# Altium PCB DMA.PcbDoc
Units mm, origin at the board's own origin, x right, y up, seen from the top; angles counter-clockwise.
Board outline 350 x 90 mm, 4 copper layers (Top Layer, Int1, Int2, Bottom Layer), stack 1.49 mm thick; 56 components, 30 nets, 162 pads, 356 vias.
Unrouted connection lines stored in the file: 5.
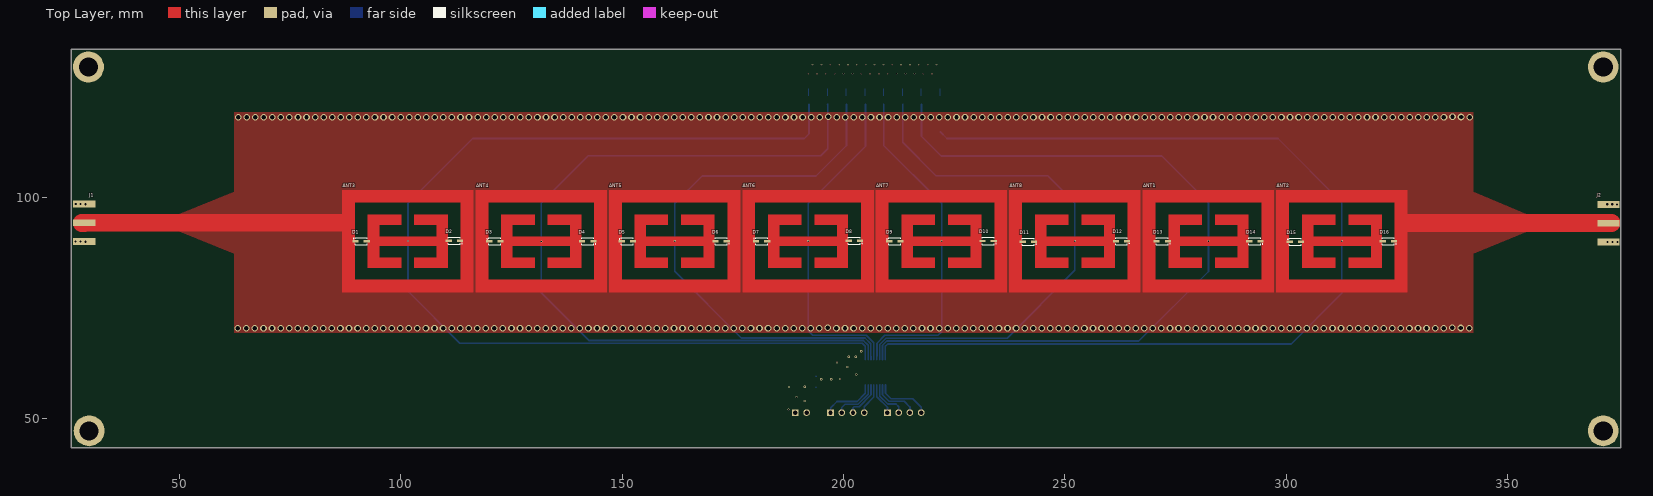
[diagram p0: Top Layer view]
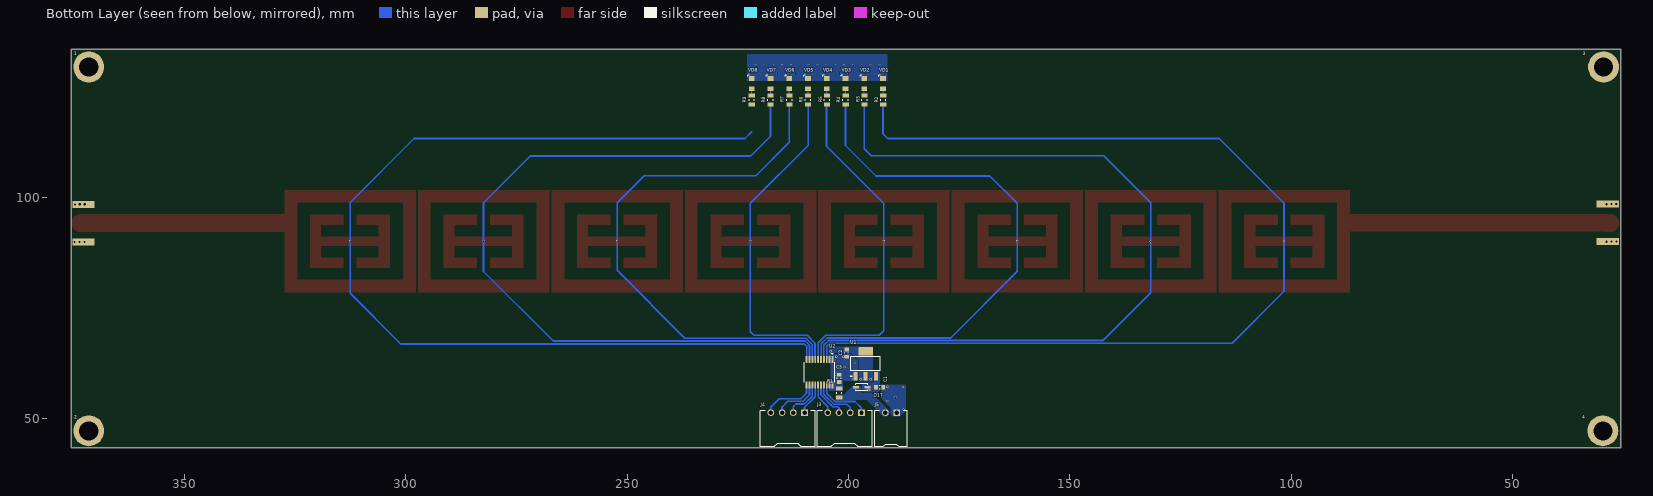
[diagram p1: Bottom Layer view, seen from below]
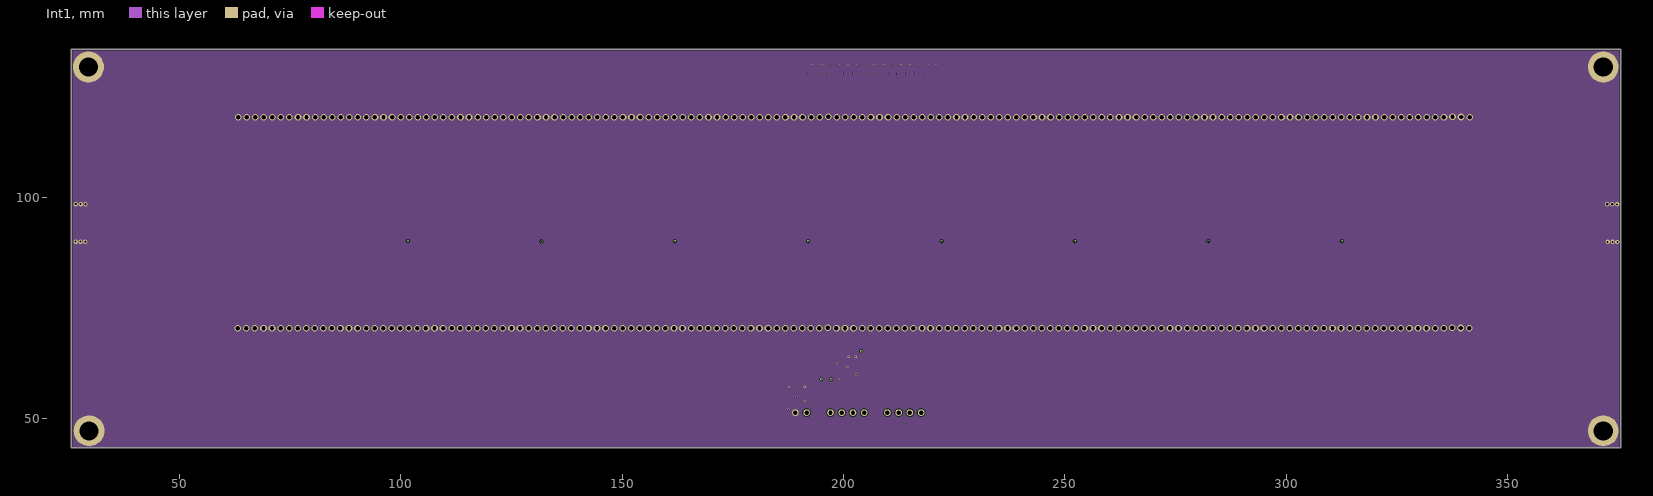
[diagram p2: Int1]
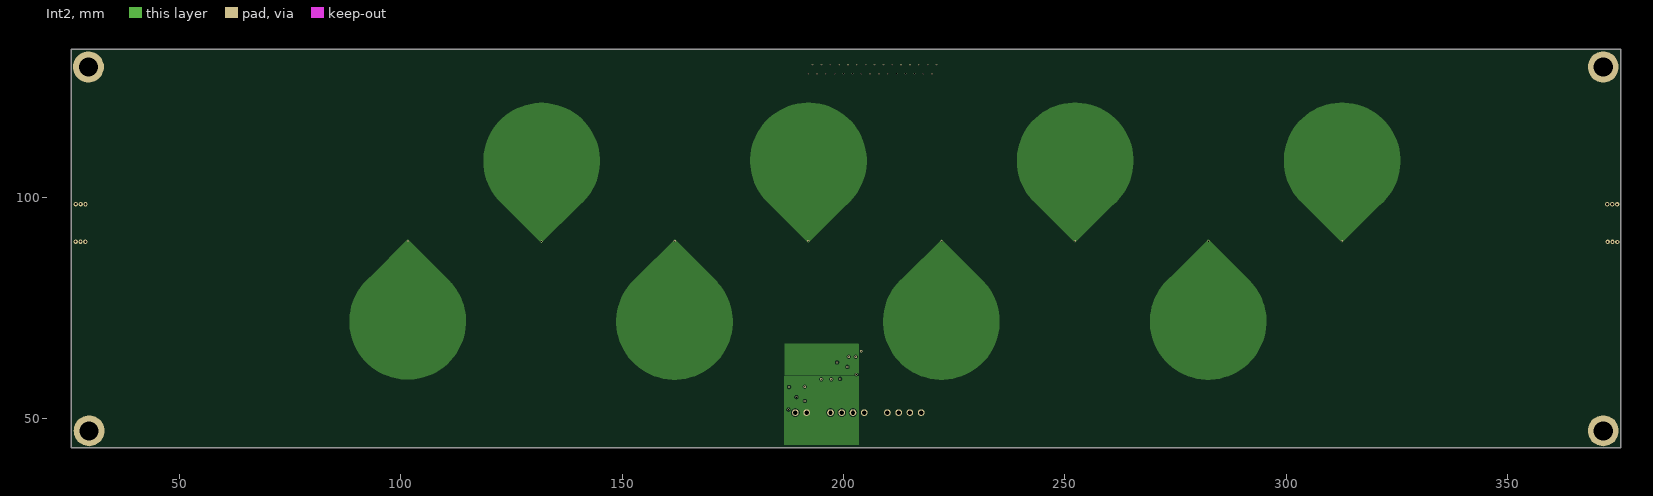
[diagram p3: Int2]
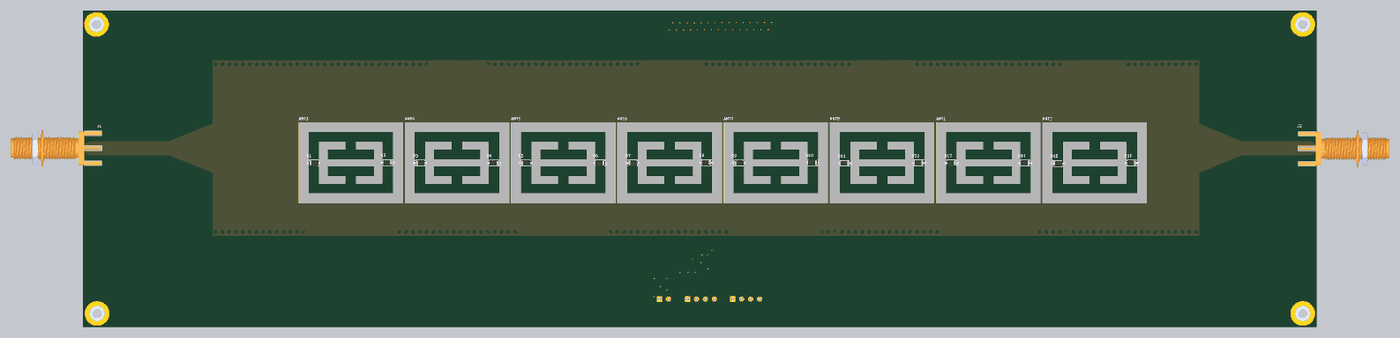
[diagram p4: 3D render of the assembled board from above, using the file's embedded part models]
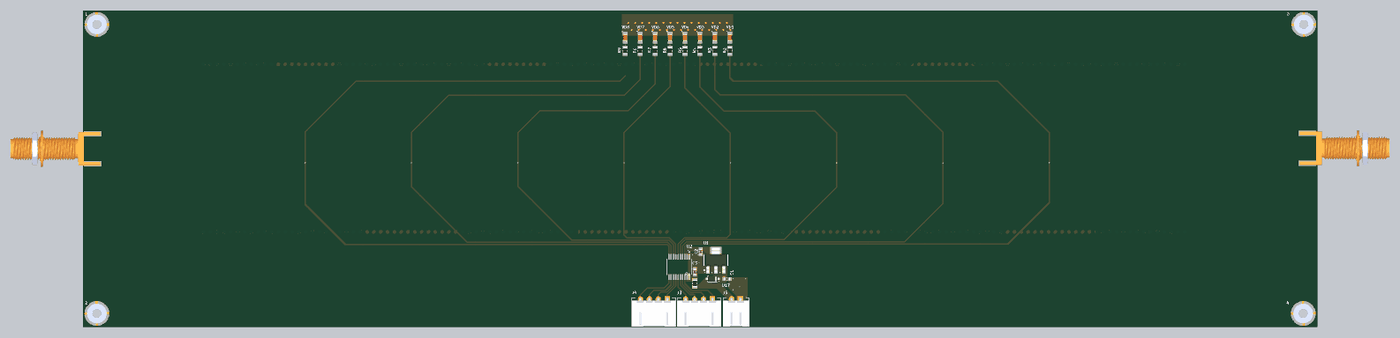
[diagram p5: 3D render of the assembled board from below, using the file's embedded part models]

## Layer stack, top to bottom
Top Solder: solder mask 0.0254, SM-001, Dk 3.5
Top Layer: signal copper 0.035
Dielectric 1: prepreg 0.127, FR4, Dk 4.2
Dielectric 2: prepreg 0.193, FR4, Dk 4.6
Int1: signal copper 0.035
Dielectric 3: core 0.71, FR4, Dk 4.6
Int2: signal copper 0.035
Dielectric 4: prepreg 0.193, FR4, Dk 4.6
Dielectric 5: prepreg 0.127, FR4, Dk 4.2
Bottom Layer: signal copper 0.035
Bottom Solder: solder mask 0.0254, SM-001, Dk 3.5

## Board outline
25.55,43.475 25.55,133.475 375.55,133.475 375.55,43.475

## Design rules (kind name [scope] priority, off if disabled: settings)
AcuteAngle [All] p1: minimum=3.50000000000000E+0001 checktracksonly=FALSE
BoardOutlineClearance "BoardOutlineClearance 1" [All] p1: gap=0.25 ignorepadtopadclearanceinfootprint=FALSE except(0: Arc-SplitContinuation Track-SplitContinuation SMDPad-SplitContinuation THPad-SplitContinuation Via-SplitContinuation Fill-SplitContinuation Poly-SplitContinuation Region-SplitContinuation Text-SplitContinuation) // Milling
BoardOutlineClearance "BoardOutlineClearance 2" [All] p2 off: gap=0.4 ignorepadtopadclearanceinfootprint=FALSE except(0: Arc-SplitContinuation Track-SplitContinuation SMDPad-SplitContinuation THPad-SplitContinuation Via-SplitContinuation Fill-SplitContinuation Poly-SplitContinuation Region-SplitContinuation Text-SplitContinuation) // V-Cut
Clearance "Clearance 3 Oz" [All] p1 off: gap=0.35 ignorepadtopadclearanceinfootprint=FALSE except(0.25: Arc-Hole Track-Hole SMDPad-Hole THPad-Hole Via-Hole Fill-Hole Poly-Hole Region-Hole Text-Hole)
Clearance "Clearance 2 Oz" [All] p2 off: gap=0.3 ignorepadtopadclearanceinfootprint=FALSE except(0.25: Arc-Hole Track-Hole SMDPad-Hole THPad-Hole Via-Hole Fill-Hole Poly-Hole Region-Hole Text-Hole)
Clearance "Clearance-1 1 Oz" [All] p3: gap=0.2 ignorepadtopadclearanceinfootprint=TRUE except(0: SMDPad-SMDPad; 0.25: Arc-Hole Track-Hole SMDPad-Hole THPad-Hole Via-Hole Fill-Hole Poly-Hole Region-Hole Text-Hole) // Standart
Clearance "Clearance-2 1 Oz" [All] p4 off: gap=0.15 ignorepadtopadclearanceinfootprint=FALSE except(0.2: Arc-Fill Arc-Poly Track-Fill Track-Poly SMDPad-Fill SMDPad-Poly THPad-Fill THPad-Poly Via-Fill Via-Poly Fill-Fill Fill-Poly Poly-Poly; 0.25: Arc-Hole Track-Hole SMDPad-Hole THPad-Hole Via-Hole Fill-Hole Poly-Hole Region-Hole Text-Hole) // Advance
Clearance "Clearance-1 1/2 Oz" [All] p5 off: gap=0.125 ignorepadtopadclearanceinfootprint=FALSE except(0.2: Arc-Fill Arc-Poly Track-Fill Track-Poly SMDPad-SMDPad SMDPad-Fill SMDPad-Poly THPad-Fill THPad-Poly Via-Fill Via-Poly Fill-Fill Fill-Poly Poly-Poly Poly-Region Poly-Text; 0.25: Arc-Hole Track-Hole SMDPad-Hole THPad-Hole Via-Hole Fill-Hole Poly-Hole Region-Hole Text-Hole) // Standart
Clearance "Clearance-2 1/2 Oz" [All] p6 off: gap=0.1 ignorepadtopadclearanceinfootprint=FALSE except(0.15: Arc-Fill Arc-Poly Track-Fill Track-Poly SMDPad-SMDPad SMDPad-Fill SMDPad-Poly THPad-Fill THPad-Poly Via-Fill Via-Poly Fill-Fill Fill-Poly Poly-Poly Poly-Region Poly-Text; 0.25: Arc-Hole Track-Hole SMDPad-Hole THPad-Hole Via-Hole Fill-Hole Poly-Hole Region-Hole Text-Hole) // Advance
ComponentClearance [InComponent('No Component') vs InComponent('No Component')] p1: gap=0.254 collisioncheckmode=3 verticalgap=0.254 showdistances=FALSE
DiffPairsRouting "DiffPairsRouting 1 Oz" [All] p1: maxlimit=0.254 minlimit=0.2 mostfreqgap=0.254 toplayer_minwidth=0.2 toplayer_maxwidth=0.381 toplayer_prefwidth=0.381 midlayer1_minwidth=0.2 midlayer1_maxwidth=0.381 midlayer1_prefwidth=0.381 midlayer2_minwidth=0.2 midlayer2_maxwidth=0.381 midlayer2_prefwidth=0.381 bottomlayer_minwidth=0.2 bottomlayer_maxwidth=0.381 bottomlayer_prefwidth=0.381 maxuncoupledlength=12.7
DiffPairsRouting "DiffPairsRouting 1/2 Oz" [All] p2 off: maxlimit=0.254 minlimit=0.1 mostfreqgap=0.254 toplayer_minwidth=0.1 toplayer_maxwidth=0.381 toplayer_prefwidth=0.381 midlayer1_minwidth=0.1 midlayer1_maxwidth=0.381 midlayer1_prefwidth=0.381 midlayer2_minwidth=0.1 midlayer2_maxwidth=0.381 midlayer2_prefwidth=0.381 bottomlayer_minwidth=0.1 bottomlayer_maxwidth=0.381 bottomlayer_prefwidth=0.381 maxuncoupledlength=12.7
HoleSize "Minimum HoleSize" [IsPad] p1 off: absolutevalues=TRUE maxlimit=5.9 minlimit=0.6 maxpercent=80.000 minpercent=20.000
HoleSize "Minimum HoleSize VIA 1" [IsVia] p2: absolutevalues=TRUE maxlimit=5.9 minlimit=0.3 maxpercent=80.000 minpercent=20.000 // Standart
HoleSize "Minimum HoleSize VIA 2" [IsVia] p3 off: absolutevalues=TRUE maxlimit=5.9 minlimit=0.2 maxpercent=80.000 minpercent=20.000 // Advance
HoleToHoleClearance Hole2HoleClearance [All] p1: gap=0.25 allowstackedmicrovias=FALSE
MinimumAnnularRing "Minimum AR VIA Standart" [IsVia] p1: minimumring=0.15
MinimumAnnularRing "Minimum AR PAD Standart" [IsPAD] p2: minimumring=0.2
MinimumAnnularRing "Minimum AR VIA Advance" [IsVia] p3 off: minimumring=0.1
MinimumAnnularRing "Minimum AR PAD Advance" [IsPAD] p4 off: minimumring=0.15
MinimumSolderMaskSliver "SolderMask Bridge Standart" [All] p1: minsoldermaskwidth=0.15 // All Masks
MinimumSolderMaskSliver "SolderMask Bridge Advance" [All] p2 off: minsoldermaskwidth=0.1 // Mask LDI
PlaneClearance "PlaneClearance 3 Oz" [All] p1 off: clearance=0.35
PlaneClearance "PlaneClearance 2 Oz" [All] p2 off: clearance=0.3
PlaneClearance "PlaneClearance 1 Oz" [All] p3: clearance=0.2
PlaneClearance "PlaneClearance-1 1/2 Oz" [All] p4 off: clearance=0.2 // Standart
PlaneClearance "PlaneClearance-2 1/2 Oz" [All] p5 off: clearance=0.15 // Advance
PlaneConnect "TermalConnect 3 Oz" [All] p1 off: planeconnectstyle=Relief reliefexpansion=0.2 reliefentries=4 reliefconductorwidth=0.35 reliefairgap=0.35 // Standart
PlaneConnect "TermalConnect 2 Oz" [All] p2 off: planeconnectstyle=Relief reliefexpansion=0.2 reliefentries=4 reliefconductorwidth=0.3 reliefairgap=0.3 // Standart
PlaneConnect "TermalConnect-1 1 Oz" [All] p3: planeconnectstyle=Relief reliefexpansion=0.2 reliefentries=4 reliefconductorwidth=0.2 reliefairgap=0.2 // Standart
PlaneConnect "TermalConnect-2 1 Oz" [All] p4 off: pad.planeconnectstyle=Relief pad.reliefexpansion=0.15 pad.reliefentries=4 pad.reliefconductorwidth=0.2 pad.reliefairgap=0.2 via.planeconnectstyle=Direct via.reliefexpansion=0.15 via.reliefentries=4 via.reliefconductorwidth=0.15 via.reliefairgap=0.15 // Advance
PlaneConnect "TermalConnect-1 1/2 Oz" [All] p5 off: planeconnectstyle=Relief reliefexpansion=0.2 reliefentries=4 reliefconductorwidth=0.2 reliefairgap=0.2 // Standart
PlaneConnect "TermalConnect-2 1/2 Oz" [All] p6 off: pad.planeconnectstyle=Relief pad.reliefexpansion=0.15 pad.reliefentries=4 pad.reliefconductorwidth=0.15 pad.reliefairgap=0.15 via.planeconnectstyle=Direct via.reliefexpansion=0.15 via.reliefentries=4 via.reliefconductorwidth=0.15 via.reliefairgap=0.15 // Advance
PolygonConnect "PolygonConnect 3 Oz" [All] p1 off: thpad.connectstyle=Relief thpad.reliefconductorwidth=0.35 thpad.reliefentries=4 thpad.polygonreliefangle="90 Angle" thpad.airgapwidth=0.35 smdpad.connectstyle=Relief smdpad.reliefconductorwidth=0.35 smdpad.reliefentries=4 smdpad.polygonreliefangle="90 Angle" smdpad.airgapwidth=0.35 via.connectstyle=Direct via.reliefconductorwidth=0.254 via.reliefentries=4 via.polygonreliefangle="90 Angle" via.airgapwidth=0.254
PolygonConnect "PolygonConnect 2 Oz" [All] p2 off: thpad.connectstyle=Relief thpad.reliefconductorwidth=0.3 thpad.reliefentries=4 thpad.polygonreliefangle="90 Angle" thpad.airgapwidth=0.3 smdpad.connectstyle=Relief smdpad.reliefconductorwidth=0.3 smdpad.reliefentries=4 smdpad.polygonreliefangle="90 Angle" smdpad.airgapwidth=0.3 via.connectstyle=Direct via.reliefconductorwidth=0.254 via.reliefentries=4 via.polygonreliefangle="90 Angle" via.airgapwidth=0.254
PolygonConnect "PolygonConnect-1 1 Oz" [All] p3: connectstyle=Direct reliefconductorwidth=0.2 reliefentries=4 polygonreliefangle="90 Angle" airgapwidth=0.2 // Standart
PolygonConnect "PolygonConnect-2 1 Oz" [All] p4 off: thpad.connectstyle=Relief thpad.reliefconductorwidth=0.15 thpad.reliefentries=4 thpad.polygonreliefangle="90 Angle" thpad.airgapwidth=0.15 smdpad.connectstyle=Relief smdpad.reliefconductorwidth=0.15 smdpad.reliefentries=4 smdpad.polygonreliefangle="90 Angle" smdpad.airgapwidth=0.15 via.connectstyle=Direct via.reliefconductorwidth=0.254 via.reliefentries=4 via.polygonreliefangle="90 Angle" via.airgapwidth=0.254 // Advance
PolygonConnect "PolygonConnect-1 1/2 Oz" [All] p5 off: thpad.connectstyle=Relief thpad.reliefconductorwidth=0.15 thpad.reliefentries=4 thpad.polygonreliefangle="90 Angle" thpad.airgapwidth=0.2 smdpad.connectstyle=Relief smdpad.reliefconductorwidth=0.2 smdpad.reliefentries=4 smdpad.polygonreliefangle="90 Angle" smdpad.airgapwidth=0.2 via.connectstyle=Direct via.reliefconductorwidth=0.254 via.reliefentries=4 via.polygonreliefangle="90 Angle" via.airgapwidth=0.254 // Standart
PolygonConnect "PolygonConnect-2 1/2 Oz" [All] p6 off: thpad.connectstyle=Relief thpad.reliefconductorwidth=0.125 thpad.reliefentries=4 thpad.polygonreliefangle="90 Angle" thpad.airgapwidth=0.15 smdpad.connectstyle=Relief smdpad.reliefconductorwidth=0.125 smdpad.reliefentries=4 smdpad.polygonreliefangle="90 Angle" smdpad.airgapwidth=0.15 via.connectstyle=Direct via.reliefconductorwidth=0.254 via.reliefentries=4 via.polygonreliefangle="90 Angle" via.airgapwidth=0.254 // Advance
RoutingCorners [All] p1 off: cornerstyle=45-Degree minsetback=2.54 maxsetback=2.54
RoutingVias [All] p1: holewidth=0.3 width=0.6 viastyle="Through Hole" minholewidth=0.2 minwidth=0.4 maxholewidth=5.9 maxwidth=6.4
SilkToSilkClearance Silk2SilkClearance [All] p1: silktosilkclearance=0.15
SilkToSolderMaskClearance Silk2SolderMaskClearance [IsPad] p1: minsilkscreentomaskgap=0.15 clearancetoexposedcopper=TRUE
SolderMaskExpansion SolderMaskExpansion-1 [All] p1: expansion=0.05 istentingtop=FALSE // Standart
SolderMaskExpansion "SolderMaskExpansion LDI" [All] p2: expansion=0.025 istentingtop=FALSE // Advance
UnRoutedNet [All] p1: checkbadconnections=TRUE
Width "Width 3 Oz" [All] p1 off: maxlimit=10 minlimit=0.35 preferedwidth=0.4 checkconnectedcopper=TRUE
Width "Width 2 Oz" [All] p2 off: maxlimit=10 minlimit=0.3 preferedwidth=0.35 minimp=50.000000 maximp=50.000000 favimp=50.000000 checkconnectedcopper=TRUE
Width "Width 1 Oz" [All] p3: maxlimit=10 minlimit=0.15 preferedwidth=0.2 checkconnectedcopper=TRUE
Width "Width 1/2 Oz" [All] p4 off: maxlimit=10 minlimit=0.1 preferedwidth=0.125 checkconnectedcopper=TRUE
19 further rules are at their usual default settings.

## Components (designator, comment, footprint, x,y, rotation, side; value= is the part's Value field where it differs from the comment)
1 "SMTSO_STAND_M3" M3x1 371.65,129.525 r270 bottom
2 "SMTSO_STAND_M3" M3x1 371.65,47.325 r90 bottom
3 "SMTSO_STAND_M3" M3x1 29.375,129.525 r90 bottom
4 "SMTSO_STAND_M3" M3x1 29.55,47.325 r90 bottom
ANT1 "CELC" PCBComponent_1 282.444,90.17 r180 top
ANT2 "CELC" PCBComponent_1 312.59,90.17 r180 top
ANT3 "CELC" PCBComponent_1 101.534,90.17 r180 top
ANT4 "CELC" PCBComponent_1 131.68,90.17 r180 top
ANT5 "CELC" PCBComponent_1 161.826,90.17 r180 top
ANT6 "CELC" PCBComponent_1 191.973,90.17 r180 top
ANT7 "CELC" PCBComponent_1 222.119,90.17 r180 top
ANT8 "CELC" PCBComponent_1 252.265,90.17 r180 top
C1 "10uF" 0603_MD_CAPC1608X04N 192.933,57.141 r180 bottom
C2 "10uF" 0603_MD_CAPC1608X04N 200.426,64.888 r270 bottom
C3 "0.1uF" 0603_MD_CAPC1608X04N 202.077,59.173 r90 bottom
D1 "Diode" SOD123_MD_DIOM2615X12N 91,90.15 r0 top
D2 "Diode" SOD123_MD_DIOM2615X12N 112.05,90.225 r180 top
D3 "Diode" SOD123_MD_DIOM2615X12N 121.2,90.125 r0 top
D4 "Diode" SOD123_MD_DIOM2615X12N 142.2,90.1 r180 top
D5 "Diode" SOD123_MD_DIOM2615X12N 151.15,90.1 r0 top
D6 "Diode" SOD123_MD_DIOM2615X12N 172.325,90.15 r180 top
D7 "Diode" SOD123_MD_DIOM2615X12N 181.5,90.15 r0 top
D8 "Diode" SOD123_MD_DIOM2615X12N 202.45,90.25 r180 top
D9 "Diode" SOD123_MD_DIOM2615X12N 211.6,90.1 r0 top
D10 "Diode" SOD123_MD_DIOM2615X12N 232.65,90.2 r180 top
D11 "Diode" SOD123_MD_DIOM2615X12N 241.775,90.05 r180 top
D12 "Diode" SOD123_MD_DIOM2615X12N 262.8,90.175 r180 top
D13 "Diode" SOD123_MD_DIOM2615X12N 272,90.15 r180 top
D14 "Diode" SOD123_MD_DIOM2615X12N 292.925,90.125 r180 top
D15 "Diode" SOD123_MD_DIOM2615X12N 302.1,90 r0 top
D16 "Diode" SOD123_MD_DIOM2615X12N 323.1,90.125 r180 top
D17 "SD103AW" SOD123_MD_DIOM2615X12N 196.997,57.141 r0 bottom
J1 "CONSMA003.062-L-G" TE_CONSMA003.062-L-G 25.875,94.325 r270 top
J2 "CONSMA003.062-L-G" TE_CONSMA003.062-L-G 375.375,94.2 r90 top
J3 "HX2.54-4P" JST_S4B-XH-A(LF)(SN) 200.865,51.425 r0 bottom
J4 "HX2.54-4P" JST_S4B-XH-A(LF)(SN) 213.72,51.425 r0 bottom
J5 "HX2.54-2P" JST_S2B-XH-A(LF)(SN) 190.38,51.425 r0 bottom
R1 "200k" 0805_MD_RESC2012X06N 202.077,55.871 r90 bottom
R2 "100R" 0805_MD_RESC2012X06N 192.15,122.05 r90 bottom
R3 "100R" 0805_MD_RESC2012X06N 196.389,122.05 r90 bottom
R4 "100R" 0805_MD_RESC2012X06N 200.629,122.05 r90 bottom
R5 "100R" 0805_MD_RESC2012X06N 204.868,122.05 r90 bottom
R6 "100R" 0805_MD_RESC2012X06N 209.107,122.05 r90 bottom
R7 "100R" 0805_MD_RESC2012X06N 213.346,122.05 r90 bottom
R8 "100R" 0805_MD_RESC2012X06N 217.586,122.05 r90 bottom
R9 "100R" 0805_MD_RESC2012X06N 221.825,122.05 r90 bottom
U1 "AMS1117-3.3" SOT223_3_HD_SOT230P700X180-4L 196.108,62.475 r90 bottom
U2 "GTL2003PW,118" SOP65P640X110-20N 206.522,60.57 r270 bottom
VD1 "LED" D0805 192.175,125.775 r90 bottom
VD2 "LED" D0805 196.411,125.775 r90 bottom
VD3 "LED" D0805 200.646,125.775 r90 bottom
VD4 "LED" D0805 204.882,125.775 r90 bottom
VD5 "LED" D0805 209.118,125.775 r90 bottom
VD6 "LED" D0805 213.354,125.775 r90 bottom
VD7 "LED" D0805 217.589,125.775 r90 bottom
VD8 "LED" D0805 221.825,125.775 r90 bottom

## Footprints (in the part's own frame and the unit in brackets; to place one, negate y for a bottom-side part, rotate by r counter-clockwise, add the part's x,y. Pads: shape width x height; smd on the part's side, far side on the other; paste and mask are expansions set on the pad)
0603_MD_CAPC1608X04N [mm] "Chip Capacitor, 2-Leads, Body 1.60x0.80mm, IPC Medium Density"
  rect 0.85x1 smd: 1(-0.825,0) 2(0.825,0)
  silkscreen extent -0.1,-0.4 0.1,0.4, body extent -0.8,-0.4 0.8,0.4, height 0.8
0805_MD_RESC2012X06N [mm] "Chip Resistor, 2-Leads, Body 2.00x1.25mm, IPC Medium Density"
  rect 0.9x1.4 smd: 1(-0.975,0) 2(0.975,0)
  silkscreen extent -0.15,-0.6 0.15,0.6, body extent -1,-0.6 1,0.6, height 0.45
D0805 [mm]
  rect 1.1x1.3 smd: 1(-1.175,0) 2(1.125,0)
  silkscreen extent 1.65,0.6 1.92,0.92, body extent -1.01,-0.63 1.01,0.62, height 1.1
JST_S2B-XH-A(LF)(SN) [mm]
  rect 1.508x1.508 / inner round 1.508 / far side rect 1.508x1.508 hole 1: 1(-1.27,0)
  round 1.508 hole 1: 2(1.27,0)
  silkscreen extent -3.7,-0.38 3.7,7.75, body extent -3.61,-0.38 3.61,7.66, height 5.89
JST_S4B-XH-A(LF)(SN) [mm]
  rect 1.508x1.508 / inner round 1.508 / far side rect 1.508x1.508 hole 1: 1(-3.81,0)
  round 1.508 hole 1: 2(-1.27,0) 3(1.27,0) 4(3.81,0)
  silkscreen extent -6.2,-0.38 6.2,7.75, body extent -6.15,-0.38 6.15,7.66, height 5.84
M3x1 [mm]
  round 7 hole 4.3: 1(0,0)
  body extent -2.8,-2.79 2.8,2.79, height 1.03
PCBComponent_1 [mil]
  round 1 smd: 1(0,0) 2(-527.56,0) 2(0,397.64) 2(0,-399.61) 2(527.56,0)
  Top Layer region: -582.68,-452.76 -472.44,-452.76 -472.44,452.76 -582.68,452.76
  Top Layer region: -472.44,-346.46 -472.44,-452.76 472.44,-452.76 472.44,-346.46
  Top Layer region: 472.44,-452.76 582.68,-452.76 582.68,452.76 472.44,452.76
  Top Layer region: -472.44,452.76 -472.44,342.52 472.44,342.52 472.44,452.76
  Top Layer region: 255.91,39.37 255.91,145.67 59.06,145.67 59.06,236.22 354.33,236.22 354.33,-236.22 59.06,-236.22 59.06,-145.67 255.91,-145.67 255.91,-39.37 -259.84,-39.37 -259.84,-145.67 -59.06,-145.67 -59.06,-236.22 -354.33,-236.22 -354.33,236.22 -59.06,236.22 -59.06,145.67 -259.84,145.67 -259.84,39.37
SOD123_MD_DIOM2615X12N [mm] "Molded Diode, 2-Leads, Body 2.60x1.48mm, IPC Medium Density"
  rect 1.4x0.55 smd: 1(-1.275,0) 2(1.275,0)
  silkscreen extent -1.8,-0.8 1.35,0.8, body extent -1.9,-0.8 1.9,0.8, height 1.25
SOP65P640X110-20N [mm]
  rrect50% 1.57x0.41 smd: 1(-2.87,2.925) 2(-2.87,2.275) 3(-2.87,1.625) 4(-2.87,0.975) 5(-2.87,0.325) 6(-2.87,-0.325) 7(-2.87,-0.975) 8(-2.87,-1.625) 9(-2.87,-2.275) 10(-2.87,-2.925) 11(2.87,-2.925) 12(2.87,-2.275) 13(2.87,-1.625) 14(2.87,-0.975) 15(2.87,-0.325) 16(2.87,0.325) 17(2.87,0.975) 18(2.87,1.625) 19(2.87,2.275) 20(2.87,2.925)
  silkscreen extent -4.3,-3.45 2.25,3.45
SOT223_3_HD_SOT230P700X180-4L [mm] "SOT223, 4-Leads, Body 6.50x7.00mm (avg), Pitch 2.30mm, IPC High Density"
  rect 1.95x0.9 smd: 1(-2.825,2.3) 2(-2.825,0) 3(-2.825,-2.3)
  rect 1.95x3.25 smd: 2(2.825,0)
  silkscreen extent -2.95,-3.35 1.55,3.43, body extent -3.5,-3.25 3.5,3.25, height 1.7
TE_CONSMA003.062-L-G [mm]
  rect 1.52x5.08 smd: 1(0,2.54) 2(-4.24,2.54) 3(4.24,2.54)
  rect 1.52x5.08 smd far side: 4(-4.24,2.54) 5(4.24,2.54)
  body extent -5.1,-20.8 5.1,4.8, height 5.5

## Part data
1 2 3 4: Package=SMTJ_stand_m3_NEW, DeviceSetName=SMTSO_STAND_M3, GateName_1=PART_1, LibraryName=SMTSO, SymbolName_1=SMTSO_STAND_M3
C1 C2 C3: library part C, "Capacitors IPC"
  C1 C2: CompCode=6915
D1 D2 D3 D4 D5 D6 D7 D8 D9 D10 D11 D12 D13 D14 D15 D16: "SMD diode"
D17: library part Diode, "SMD diode", CompCode=453
J1 J2: Package=None, AVAILABILITY=Unavailable, MP=CONSMA003.062-L-G, PRICE=None
J3 J4: "JST HX 2.54 4P", CompCode=1615
J5: "JST HX 2.54 2P", CompCode=395
R1 R2 R3 R4 R5 R6 R7 R8 R9: library part R, "Resistors IPC"
U1: "800mA LOW DROPOUT VOLTAGE REGULATOR", CompCode=3597, Datasheet=Q:\Software\Altium\Datasheets\AMS1117.pdf
U2: "Voltage Level Translator Bidirectional 1 Circuit 8 Channel 20-TSSOP", Package="TSSOP-20 NXP Semiconductors", CHECK_PRICES=https://www.snapeda.com/parts/GTL2003PW,118/NXP%20USA%20Inc./view-part/481710/?ref=eda, Digi-Key_Part_Number=568-12295-1-ND, MF="NXP USA", MP=GTL2003PW,118, Purchase-URL=https://pricing.snapeda.com/search/part/GTL2003PW,118/?ref=eda, SNAPEDA_LINK=https://www.snapeda.com/parts/GTL2003PW,118/NXP%20USA%20Inc./view-part/481710/?ref=snap
VD1 VD2 VD3 VD4 VD5 VD6 VD7 VD8: Package=LED_3mm_DIP_Blue, DeviceSetName=LED_3MM_DIP_BLUE, GateName_1=PART_1, LibraryName=LED, SymbolName_1=LED_1204_R/A

## Via types
v1: diameter 1.5, hole 1, Top Layer to Int1, tented both sides, 290 vias
v2: diameter 0.4, hole 0.2, Top Layer to Bottom Layer, 30 vias
v3: diameter 0.5, hole 0.3, Top Layer to Bottom Layer, tented both sides, 24 vias
v4: diameter 1, hole 0.5, Top Layer to Bottom Layer, tented both sides, 12 vias

## Nets (pads, with @x,y where several pads share a name; then routed paths per layer and width w, separated by ;. In a path a pad name is that pad's centre, name@x,y a point inside that pad or via, vN(x,y) a via of type N, cw(c..) or ccw(c..) an arc to the next point about the centre after c; other vN are vias at no path point)
1.2V: C2.1 U1.2 U2.2
  other v3: 194.95,58.95 194.95,58.95 197.225,58.95 203.975,65.3
3.3V: D17.2 J5.2 R1.1
ANT1: ANT3.1 D1.2 D2.2 R2.1 U2.3 | length 235.1
  Bottom Layer w0.381: R2.1 192.175,121.05 192.175,114.4 191.15,113.375 116.2,113.375 101.567,98.742 v3(101.567,90.201) 101.567,78.816 113.308,67.075 204.225,67.075 204.882,66.418 204.882,63.455 U2.3
ANT2: ANT4.1 D3.2 D4.2 R3.1 U2.4 | length 182.1
  Bottom Layer w0.381: R3.1 196.425,121.039 196.425,111.05 194.825,109.45 142.35,109.45 131.713,98.813 131.713,90.112 v3(131.725,90.1) 131.713,90.088 131.713,78.515 142.528,67.7 204.5,67.7 205.547,66.653 U2.4
ANT3: ANT5.1 D5.2 D6.2 R4.1 U2.5 | length 123.5
  Bottom Layer w0.381: R4.1 200.646,121.057 200.646,111.771 193.775,104.9 168.05,104.9 161.859,98.709 v3(161.859,90.17) 161.859,83.341 176.906,68.294 204.831,68.294 206.143,66.983 206.143,64.155 206.182,64.115 206.182,63.455 U2.5
ANT4: ANT6.1 D7.2 D8.2 R5.1 U2.6 | length 76.3
  Bottom Layer w0.381: R5.1 204.975,120.968 204.975,111.65 192.005,98.68 v3(192.005,90.17) 192.005,69.895 193.025,68.875 205.1,68.875 206.792,67.183 206.792,64.155 206.832,64.115 206.832,63.455 U2.6
ANT5: ANT7.1 D9.2 D10.2 R6.1 U2.7 | length 76.2
  Bottom Layer w0.381: U2.7 207.512,63.455 207.512,64.115 207.552,64.155 207.552,67.102 209.325,68.875 221.325,68.875 222.151,69.701 v3(222.151,90.17) 222.151,98.699 209.075,111.775 209.075,121.043 R6.1
ANT6: ANT8.1 D11.2 D12.2 R7.1 U2.8 | length 122.8
  Bottom Layer w0.381: U2.8 208.147,66.822 209.575,68.25 236.95,68.25 252.265,83.565 v3(252.265,90.17) 252.265,98.81 246.125,104.95 220.9,104.95 213.354,112.496 213.354,121.068 R7.1
ANT7: ANT1.1 D13.2 D14.2 R8.1 U2.9 | length 177.5
  Bottom Layer w0.381: U2.9 208.812,63.455 208.812,66.636 209.775,67.6 266.725,67.6 282.444,83.319 v3(282.444,90.17) 282.444,98.831 271.875,109.4 222.1,109.4 217.589,113.911 217.589,121.071 R8.1
ANT8: ANT2.1 D15.2 D16.2 R9.1 U2.10 | length 229
  Bottom Layer w0.381: U2.10 209.447,66.397 209.975,66.925 301.156,66.925 312.59,78.359 v3(312.59,90.17) 312.59,98.915 298.155,113.35 223.375,113.35 221.825,114.9
GND: 1.1 2.1 3.1 4.1 C1.2 C2.2 C3.2 J1.2 J1.3 J1.4 J1.5 J2.2 J2.3 J2.4 J2.5 J5.1 U1.1 U2.1 VD1.2 VD2.2 VD3.2 VD4.2 VD5.2 VD6.2 VD7.2 VD8.2
  other v1: 63.133,70.525 65.065,70.525 66.997,70.525 68.929,70.525 70.862,70.525 72.794,70.525 74.726,70.525 76.659,70.525 78.591,70.525 80.523,70.525 82.455,70.525 84.388,70.525 86.32,70.525 88.252,70.525 90.185,70.525 92.117,70.525 94.049,70.525 95.981,70.525 97.914,70.525 99.846,70.525 101.778,70.525 103.711,70.525 105.643,70.525 107.575,70.525 109.508,70.525 111.44,70.525 113.372,70.525 115.304,70.525 117.237,70.525 119.169,70.525 121.101,70.525 123.034,70.525 124.966,70.525 126.898,70.525 128.83,70.525 130.763,70.525 132.695,70.525 134.627,70.525 136.56,70.525 138.492,70.525 140.424,70.525 142.356,70.525 144.289,70.525 146.221,70.525 148.153,70.525 150.086,70.525 152.018,70.525 153.95,70.525 155.882,70.525 157.815,70.525 159.747,70.525 161.679,70.525 163.612,70.525 165.544,70.525 167.476,70.525 169.409,70.525 171.341,70.525 173.273,70.525 175.205,70.525 177.138,70.525 179.07,70.525 181.002,70.525 182.935,70.525 184.867,70.525 186.799,70.525 188.731,70.525 190.664,70.525 192.596,70.525 194.528,70.525 198.393,70.525 200.325,70.525 202.257,70.525 204.19,70.525 206.122,70.525 208.054,70.525 209.987,70.525 211.919,70.525 213.851,70.525 215.783,70.525 217.716,70.525 219.648,70.525 223.513,70.525 225.445,70.525 227.377,70.525 229.309,70.525 231.242,70.525 233.174,70.525 235.106,70.525 237.039,70.525 238.971,70.525 240.903,70.525 242.836,70.525 244.768,70.525 246.7,70.525 248.632,70.525 250.565,70.525 252.497,70.525 254.429,70.525 256.362,70.525 258.294,70.525 260.226,70.525 262.158,70.525 264.091,70.525 266.023,70.525 267.955,70.525 269.888,70.525 271.82,70.525 273.752,70.525 275.684,70.525 277.617,70.525 279.549,70.525 281.481,70.525 283.414,70.525 285.346,70.525 287.278,70.525 289.21,70.525 291.143,70.525 293.075,70.525 295.007,70.525 296.94,70.525 298.872,70.525 300.804,70.525 302.736,70.525 304.669,70.525 306.601,70.525 308.533,70.525 310.466,70.525 312.398,70.525 314.33,70.525 316.263,70.525 318.195,70.525 320.127,70.525 322.059,70.525 323.992,70.525 325.924,70.525 327.856,70.525 329.789,70.525 331.721,70.525 333.653,70.525 335.585,70.525 341.382,70.525 339.45,70.55 196.461,70.575 337.518,70.575
  other v2: 192,128 194,128 196,128 198,128 200,128 202,128 204,128 206,128 208,128 210,128 212,128 214,128 216,128 218,128 220,128 193,130 195,130 197,130 199,130 201,130 203,130 205,130 207,130 209,130 211,130 213,130 215,130 217,130 219,130 221,130
  other v3: 187.55,52.1 191.25,54.05 189.35,54.925 187.675,57.2 191.225,57.275 199.225,59.025 202.875,60.025 200.85,61.75 198.525,62.775 198.525,62.775 201.175,64.025 202.75,64.025
  other v4: 374.85,89.975 372.625,90 373.737,90 28.7,90.05 26.475,90.075 27.588,90.075 374.775,98.475 372.55,98.5 373.663,98.5 28.725,98.525 26.5,98.55 27.613,98.55
NetC1_1: C1.1 D17.1 U1.3 | length 0.1
  Bottom Layer w0.381: C1.1 C1.1@193.783,57.166 ; U1.3@193.783,59.625 U1.3
NetC3_1: C3.1 R1.2 U2.19 U2.20
NetJ3_1: J3.1 U2.18 | length 12.2
  Bottom Layer w0.381: J3.1 197.102,51.472 197.102,52.527 198.525,53.95 203.075,53.95 204.897,55.772 U2.18
NetJ3_2: J3.2 U2.17 | length 10.5
  Bottom Layer w0.381: J3.2 199.595,52.595 200.325,53.325 203.272,53.325 205.547,55.6 U2.17
NetJ3_3: J3.3 U2.16 | length 8.6
  Bottom Layer w0.381: J3.3 202.152,51.442 202.152,52.521 202.375,52.744 203.512,52.744 206.197,55.429 U2.16
NetJ3_4: J3.4 U2.15 | length 7.2
  Bottom Layer w0.381: J3.4 204.675,52.775 206.847,54.947 U2.15
NetJ4_1: J4.1 U2.14 | length 7.3
  Bottom Layer w0.381: U2.14 207.497,55.031 209.91,52.618 J4.1
NetJ4_2: J4.2 U2.13 | length 9.2
  Bottom Layer w0.381: U2.13 208.162,57.686 208.162,57.025 208.201,56.985 208.201,55.149 209.962,53.388 211.837,53.388 212.45,52.775 J4.2
NetJ4_3: J4.3 U2.12 | length 10.9
  Bottom Layer w0.381: U2.12 208.812,57.686 208.812,55.438 210.281,53.969 213.731,53.969 214.99,52.71 J4.3
NetJ4_4: J4.4 U2.11 | length 12.5
  Bottom Layer w0.381: U2.11 209.462,57.686 209.462,55.814 210.725,54.55 215.65,54.55 217.53,52.67 J4.4
NetR2_2: R2.2 VD1.1 | length 1.6
  Bottom Layer w0.2: R2.2 192.175,123.05 VD1.1
NetR3_2: R3.2 VD2.1 | length 1.6
  Bottom Layer w0.2: R3.2 196.411,123.046 VD2.1
NetR4_2: R4.2 VD3.1 | length 1.6
  Bottom Layer w0.2: R4.2 200.646,123.043 VD3.1
NetR5_2: R5.2 VD4.1 | length 1.6
  Bottom Layer w0.2: R5.2 204.868,124.586 VD4.1
NetR6_2: R6.2 VD5.1 | length 1.6
  Bottom Layer w0.2: R6.2 209.118,123.036 VD5.1
NetR7_2: R7.2 VD6.1 | length 1.6
  Bottom Layer w0.2: R7.2 213.354,123.032 VD6.1
NetR8_2: R8.2 VD7.1 | length 1.6
  Bottom Layer w0.2: R8.2 217.589,123.029 VD7.1
NetR9_2: R9.2 VD8.1 | length 1.6
  Bottom Layer w0.2: R9.2 VD8.1
RF: ANT1.2 ANT2.2 ANT3.2 ANT4.2 ANT5.2 ANT6.2 ANT7.2 ANT8.2 D1.1 D2.1 D3.1 D4.1 D5.1 D6.1 D7.1 D8.1 D9.1 D10.1 D11.1 D12.1 D13.1 D14.1 D15.1 D16.1 J1.1 J2.1 | length 120.2
  Top Layer w0.381: 87.673,100.33 88.167,99.836 88.167,99.158 ; ANT2.2@312.59,100.32 312.727,100.457
  Top Layer w2: 312.727,100.457 325.99,100.457
  Top Layer w4: J1.1@28.55,94.32 28.417,94.307 27.85,94.25 28.415,94.251 86.75,94.319 ; 327.75,94.288 372.835,94.288 J2.1@373.525,94.288
copper on no net:
  other v1: 221.58,70.525 63.2,118.2 65.132,118.2 67.065,118.2 68.997,118.2 70.929,118.2 72.861,118.2 74.794,118.2 76.726,118.2 78.658,118.2 80.591,118.2 82.523,118.2 84.455,118.2 86.387,118.2 88.32,118.2 90.252,118.2 92.184,118.2 94.117,118.2 96.049,118.2 97.981,118.2 99.914,118.2 101.846,118.2 103.778,118.2 105.71,118.2 107.643,118.2 109.575,118.2 111.507,118.2 113.44,118.2 115.372,118.2 117.304,118.2 119.236,118.2 121.169,118.2 123.101,118.2 125.033,118.2 126.966,118.2 128.898,118.2 130.83,118.2 132.762,118.2 134.695,118.2 136.627,118.2 138.559,118.2 140.492,118.2 142.424,118.2 144.356,118.2 146.288,118.2 148.221,118.2 150.153,118.2 152.085,118.2 154.018,118.2 155.95,118.2 157.882,118.2 159.814,118.2 161.747,118.2 163.679,118.2 165.611,118.2 167.544,118.2 169.476,118.2 171.408,118.2 173.341,118.2 175.273,118.2 177.205,118.2 179.137,118.2 181.07,118.2 183.002,118.2 184.934,118.2 186.867,118.2 188.799,118.2 190.731,118.2 192.663,118.2 194.596,118.2 198.46,118.2 200.393,118.2 202.325,118.2 204.257,118.2 206.189,118.2 208.122,118.2 210.054,118.2 211.986,118.2 213.919,118.2 215.851,118.2 217.783,118.2 219.715,118.2 221.648,118.2 223.58,118.2 225.512,118.2 227.445,118.2 229.377,118.2 231.309,118.2 233.241,118.2 235.174,118.2 237.106,118.2 239.038,118.2 240.971,118.2 242.903,118.2 244.835,118.2 246.768,118.2 248.7,118.2 250.632,118.2 252.564,118.2 254.497,118.2 256.429,118.2 258.361,118.2 260.294,118.2 262.226,118.2 264.158,118.2 266.09,118.2 268.023,118.2 269.955,118.2 271.887,118.2 273.82,118.2 275.752,118.2 277.684,118.2 279.616,118.2 281.549,118.2 283.481,118.2 285.413,118.2 287.346,118.2 289.278,118.2 291.21,118.2 293.142,118.2 295.075,118.2 297.007,118.2 298.939,118.2 300.872,118.2 302.804,118.2 304.736,118.2 306.669,118.2 308.601,118.2 310.533,118.2 312.465,118.2 314.398,118.2 316.33,118.2 318.262,118.2 320.195,118.2 322.127,118.2 324.059,118.2 325.991,118.2 327.924,118.2 329.856,118.2 331.788,118.2 333.721,118.2 335.653,118.2 341.45,118.2 339.517,118.225 196.528,118.25 337.585,118.25

## Polygon pours and split planes (outlines as drawn)
GND on Bottom Layer "NETJ2_2_L04_P-001" (solid, pour order 21): 191.175,126.375 191.175,132.45 222.825,132.45 222.825,126.375
GND on Bottom Layer "NETJ2_2_L04_P-001" (solid, pour order 20): 192.538,57.675 187.1,57.675 187.1,51.875 188.325,50.65 189.925,50.65 190.45,51.175 190.45,52.575 192.563,54.688
GND on Bottom Layer "NETJ2_2_L04_P-001" (solid, pour order 19): 197.7,63.202 199.352,64.854 203.529,64.854 203.575,64.9 203.935,64.54 204.025,64.54 204.025,59.25 203.45,58.675 197.728,58.675 197.697,58.707
1.2V on Bottom Layer "NETJ2_2_L04_P-001" (solid, pour order 2): 194.5,66.285 204.45,66.285 204.45,62.603 204.025,62.622 204.025,64.54 203.575,64.9 199.356,64.854 197.7,63.202 197.7,58.538 194.5,58.538
3.3V on Bottom Layer "NETJ2_2_L04_P-001" (solid, pour order 5): 197.45,57.525 199.025,57.525 201.1,55.45 202.825,55.45 202.825,54.375 202.775,54.325 195.875,54.325 192.175,50.625 191.25,50.625 190.825,51.05 190.825,51.875 194.775,55.825 196.925,55.825 197.225,56.125 197.225,57.3
NetC1_1 on Bottom Layer "tga" (solid, pour order 3): 194.3,60.825 192.9,60.825 192.9,56.525 193.375,56.05 196.725,56.05 196.95,56.275 196.95,58.2 194.3,58.2
NetC3_1 on Bottom Layer "NETJ2_2_L04_P-001" (solid, pour order 4): 201.3,58.75 204.475,58.75 204.475,56.4 201.3,56.4
3.3V on Int2 "NETJ2_2_L04_P-001" (solid, pour order 17): 186.625,58.175 186.625,44.15 203.375,44.15 203.375,59.625 186.625,59.625
1.2V on Int2 "1.2V_L03_P018" (solid, pour order 18): 203.387,59.9 203.412,67 186.675,67 186.675,59.9
ANT8 on Int2 "NETJ2_2_L04_P-001" (solid, pour order 16): 312.51,89.899 303.019,99.39 302.987,99.444 cw(c312.649,108.331) 299.521,108.331 cw(c312.649,108.331) 312.649,121.458 cw(c312.649,108.331) 325.776,108.331 cw(c312.649,108.331) 320.926,98.142 312.724,89.94 312.712,89.929 cw(c312.6,89.989)
ANT7 on Int2 "NETJ2_2_L04_P-001" (solid, pour order 15): 282.524,90.441 292.015,80.95 292.047,80.896 cw(c282.385,72.009) 295.513,72.009 cw(c282.385,72.009) 282.385,58.882 cw(c282.385,72.009) 269.258,72.009 cw(c282.385,72.009) 274.107,82.198 282.31,90.4 282.322,90.411 cw(c282.434,90.351)
ANT6 on Int2 "NETJ2_2_L04_P-001" (solid, pour order 14): 252.185,89.899 242.694,99.39 242.662,99.444 cw(c252.324,108.331) 239.196,108.331 cw(c252.324,108.331) 252.324,121.458 cw(c252.324,108.331) 265.451,108.331 cw(c252.324,108.331) 260.601,98.142 252.399,89.94 252.387,89.929 cw(c252.275,89.989)
ANT5 on Int2 "NETJ2_2_L04_P-001" (solid, pour order 13): 222.232,90.441 231.722,80.95 231.754,80.896 cw(c222.093,72.009) 235.22,72.009 cw(c222.093,72.009) 222.093,58.882 cw(c222.093,72.009) 208.966,72.009 cw(c222.093,72.009) 213.815,82.198 222.017,90.4 222.029,90.411 cw(c222.142,90.351)
ANT1 on Int2 "NETJ2_2_L04_P-001" (solid, pour order 12): 101.647,90.472 111.138,80.981 111.17,80.928 cw(c101.508,72.04) 114.636,72.04 cw(c101.508,72.04) 101.508,58.913 cw(c101.508,72.04) 88.381,72.04 cw(c101.508,72.04) 93.23,82.229 101.433,90.431 101.445,90.442 cw(c101.557,90.382)
ANT2 on Int2 "NETJ2_2_L04_P-001" (solid, pour order 11): 131.645,89.829 122.154,99.32 122.122,99.374 cw(c131.784,108.261) 118.656,108.261 cw(c131.784,108.261) 131.784,121.388 cw(c131.784,108.261) 144.911,108.261 cw(c131.784,108.261) 140.061,98.072 131.859,89.87 131.847,89.859 cw(c131.735,89.919)
ANT4 on Int2 "NETJ2_2_L04_P-001" (solid, pour order 10): 191.924,89.878 182.433,99.369 182.401,99.422 cw(c192.063,108.31) 178.936,108.31 cw(c192.063,108.31) 192.063,121.437 cw(c192.063,108.31) 205.19,108.31 cw(c192.063,108.31) 200.341,98.121 192.139,89.919 192.127,89.908 cw(c192.014,89.968)
ANT3 on Int2 "NETJ2_2_L04_P-001" (solid, pour order 9): 161.939,90.441 171.43,80.95 171.462,80.896 cw(c161.801,72.009) 174.928,72.009 cw(c161.801,72.009) 161.801,58.882 cw(c161.801,72.009) 148.673,72.009 cw(c161.801,72.009) 153.523,82.198 161.725,90.4 161.737,90.411 cw(c161.849,90.351)
GND on Int1 "NETJ2_2_L04_P-001" (solid, pour order 6): 25.575,133.425 25.625,133.475 375.55,133.475 375.55,43.475 25.55,43.475
RF on Top Layer "NETJ2_2_L04_P-001" (solid, pour order 0): 62.315,69.425 62.315,87.35 49.775,92.375 49.775,96.275 62.315,101.3 62.315,119.275 342.315,119.275 342.315,101.3 354.35,96.275 354.35,92.275 342.315,87.35 342.315,69.425

## Other copper
Top Layer:
  pour cut-out: 88.867,99.599 114.267,99.599 114.267,80.803 88.994,80.803 88.867,80.93
  pour cut-out: 119.013,99.568 144.413,99.568 144.413,80.772 119.14,80.772 119.013,80.899
  pour cut-out: 149.159,99.568 174.559,99.568 174.559,80.772 149.286,80.772 149.159,80.899
  pour cut-out: 179.305,99.568 204.705,99.568 204.705,80.772 179.432,80.772 179.305,80.899
  pour cut-out: 209.451,99.568 234.851,99.568 234.851,80.772 209.578,80.772 209.451,80.899
  pour cut-out: 239.598,99.568 264.998,99.568 264.998,80.772 239.725,80.772 239.598,80.899
  pour cut-out: 269.744,99.568 295.144,99.568 295.144,80.772 269.871,80.772 269.744,80.899
  pour cut-out: 299.89,99.568 325.29,99.568 325.29,80.772 300.017,80.772 299.89,80.899

## Silkscreen, mask and mechanical layers (free items; w line width, h text height)
Mechanical 1:
  the board outline again, w0.254